# Altium PCB proLAYOUT.PcbDoc
Units mm, origin at the board's own origin, x right, y up, seen from the top; angles counter-clockwise.
Board outline 152.4 x 101.6 mm, 2 copper layers (Top Layer, Bottom Layer); 83 components, 52 nets, 274 pads, 27 vias.
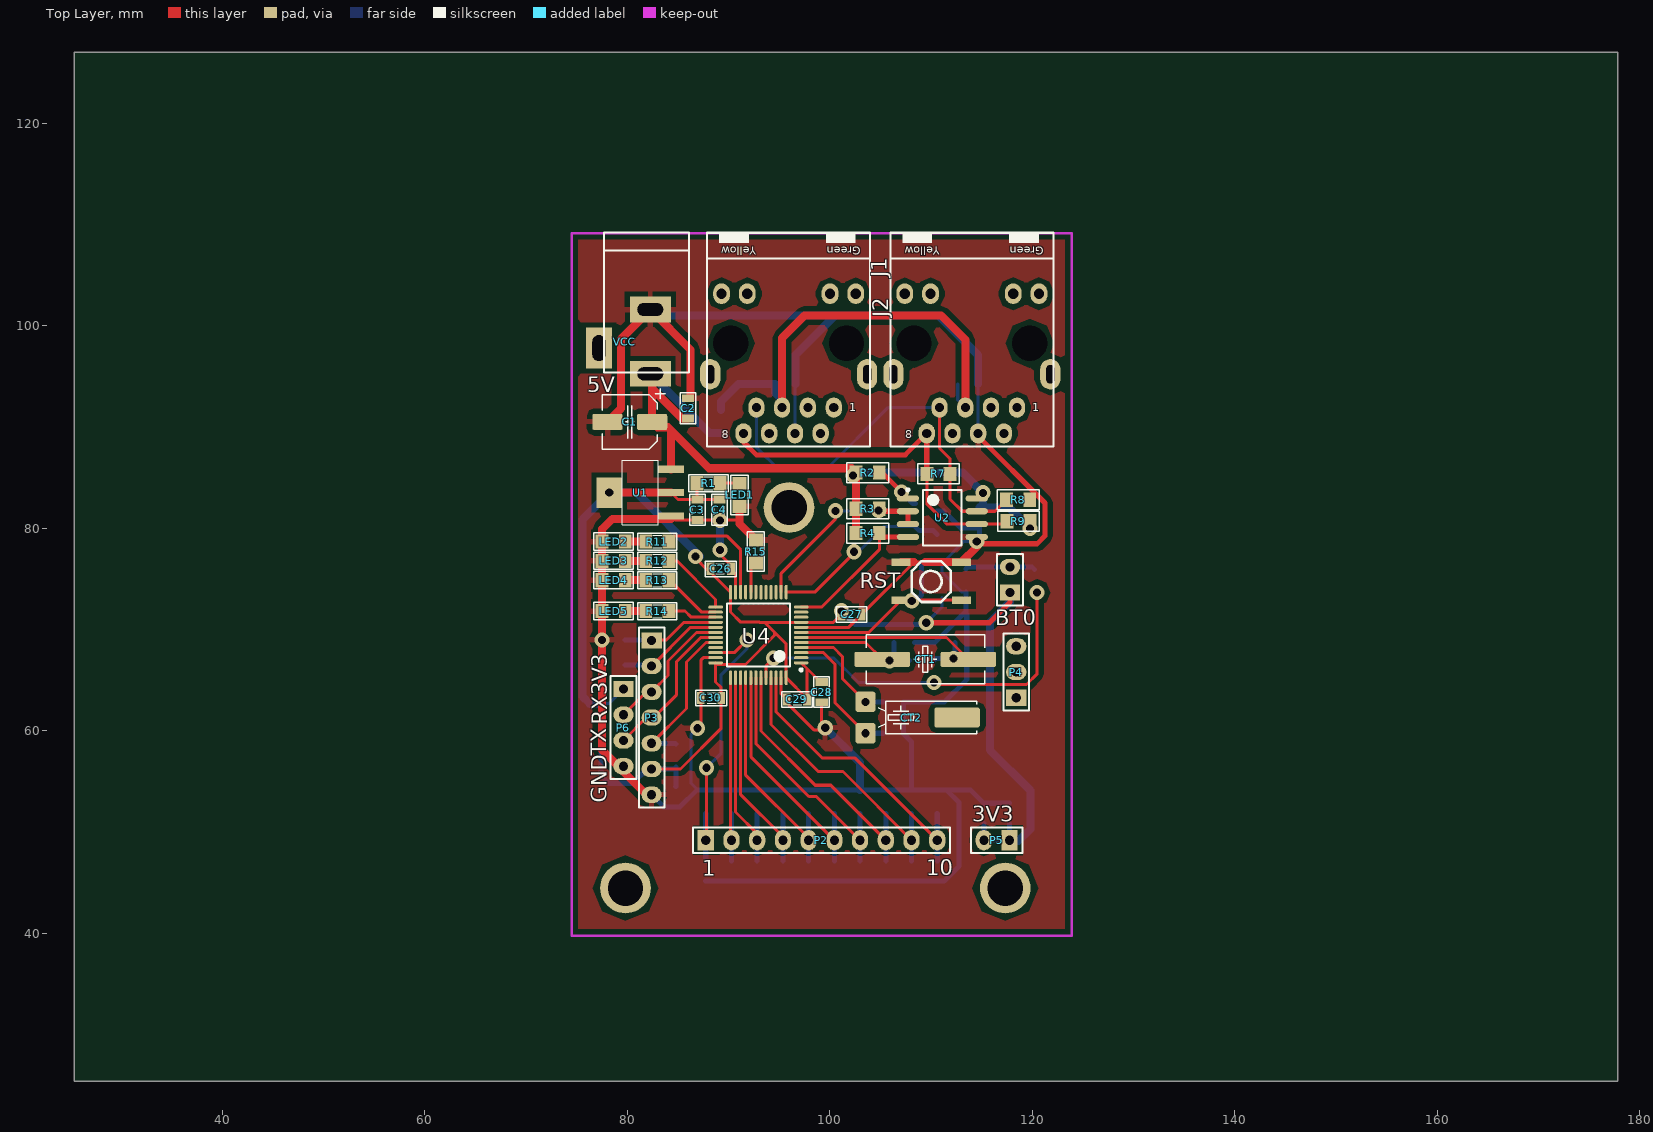
[diagram p0: Top Layer view]
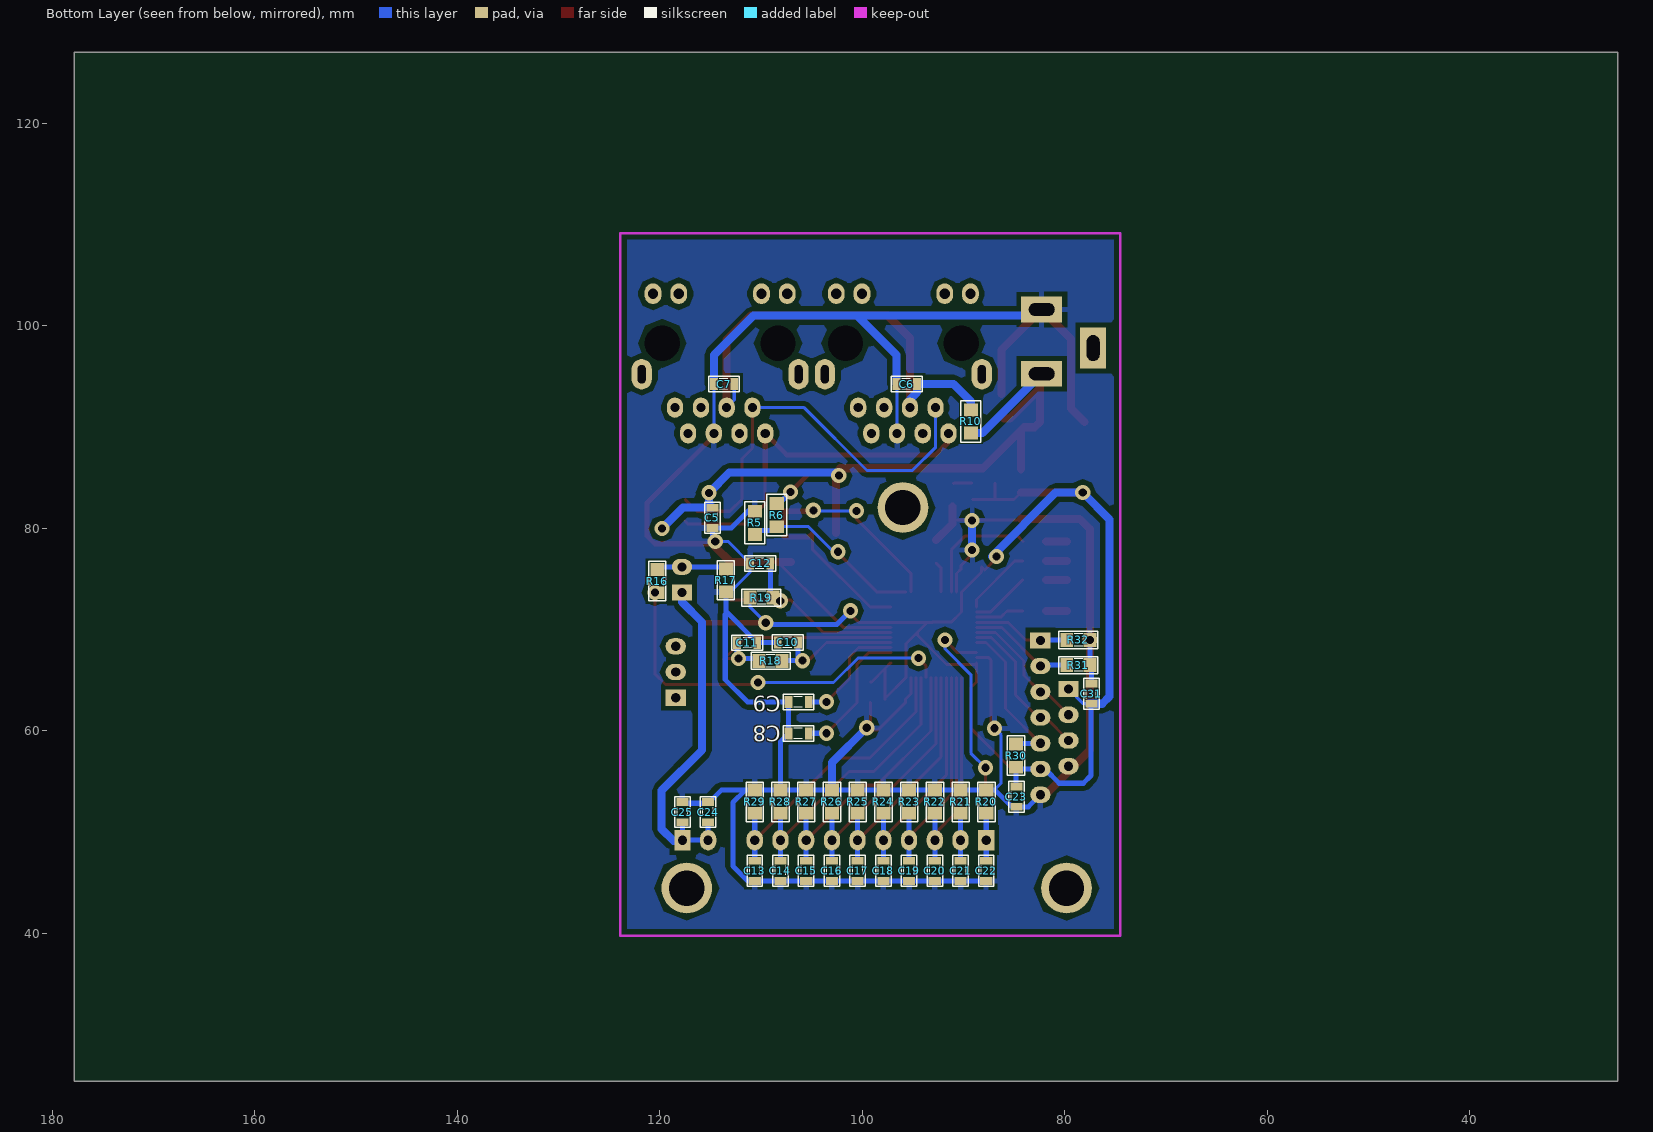
[diagram p1: Bottom Layer view, seen from below]
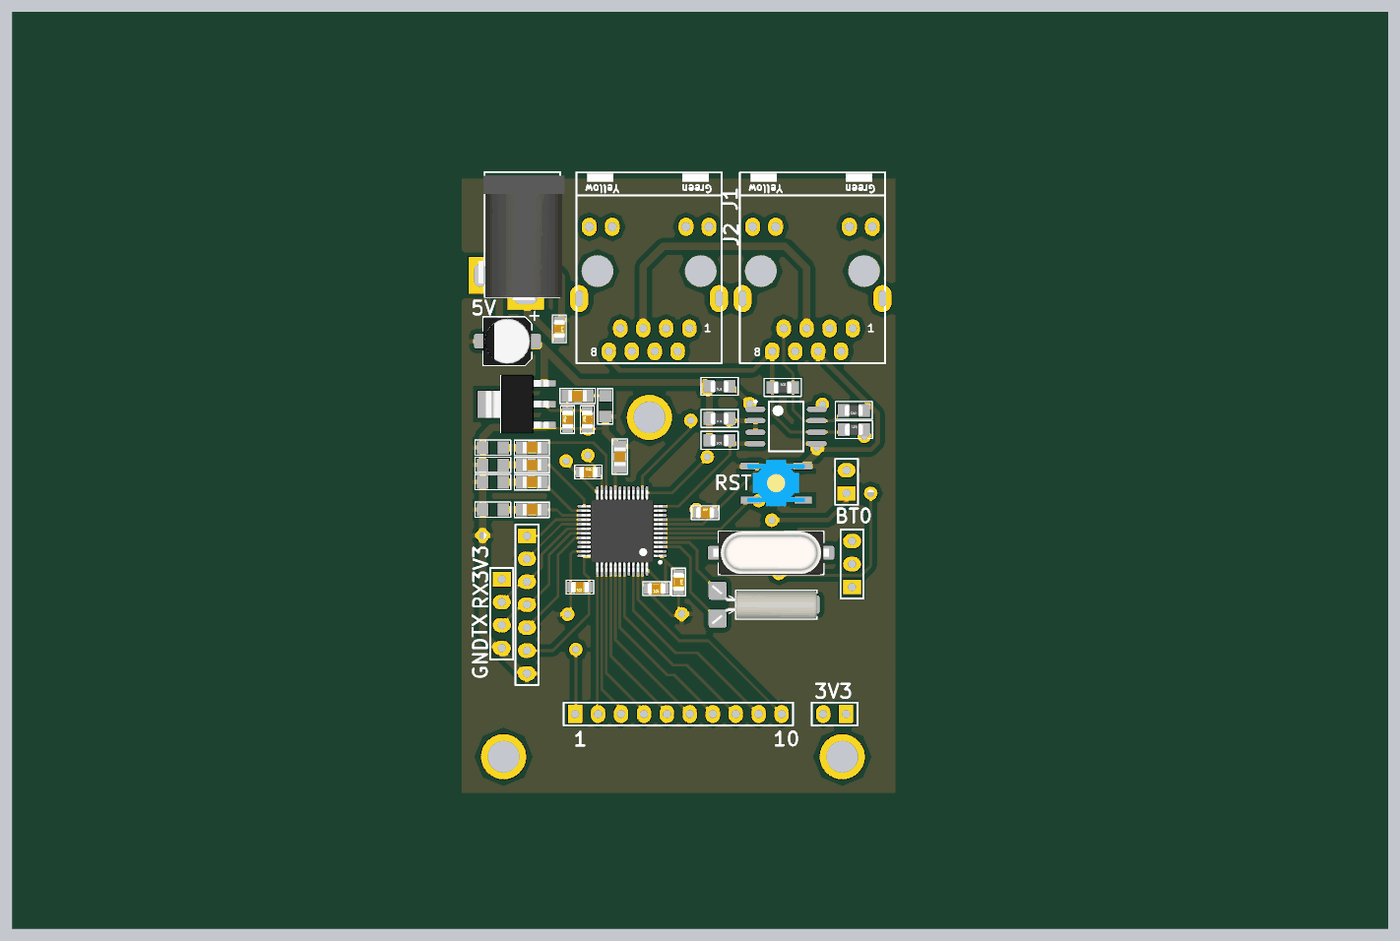
[diagram p2: 3D render of the assembled board from above, using the file's embedded part models]
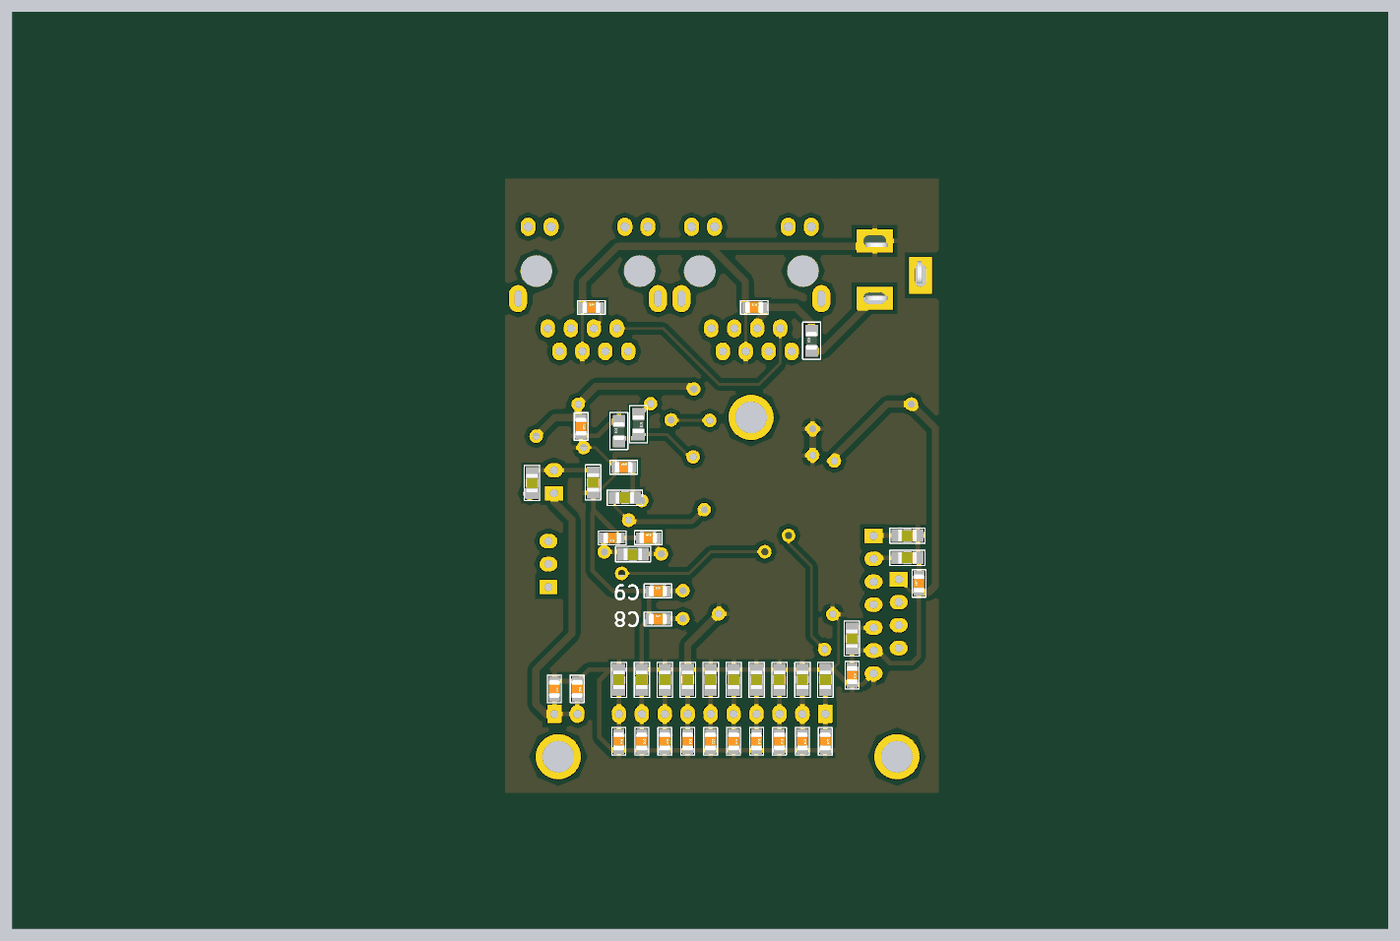
[diagram p3: 3D render of the assembled board from below, using the file's embedded part models]

## Layer stack, top to bottom
Top Solder: solder mask 0.0102, Solder Resist, Dk 3.5
Top Layer: signal copper 0.0356
Dielectric 1: dielectric 0.32, FR-4, Dk 4.8
Bottom Layer: signal copper 0.0356
Bottom Solder: solder mask 0.0102, Solder Resist, Dk 3.5

## Board outline
25.4,25.4 177.8,25.4 177.8,127 25.4,127

## Design rules (kind name [scope] priority, off if disabled: settings)
Clearance [All] p1: gap=0.5
ComponentClearance [All] p1: gap=0.2 collisioncheckmode=3 verticalgap=0.2 showdistances=FALSE
HoleSize [All] p1 off: absolutevalues=TRUE maxlimit=2.54 minlimit=0.025 maxpercent=80.000 minpercent=20.000
HoleToHoleClearance [All] p1 off: gap=0.254 allowstackedmicrovias=TRUE
LayerPairs [All] p1 off: enforce=TRUE
MinimumSolderMaskSliver [All] p1 off: minsoldermaskwidth=0.254
PolygonConnect [All] p1: connectstyle=Relief reliefconductorwidth=0.5 reliefentries=4 polygonreliefangle="90 Angle" airgapwidth=0.5
RoomDefinition proLAYOUT [InComponentClass('proLAYOUT')] p1: confinementstyle=ConfineIn formatcopy=TRUE lockcomponents=FALSE outline 178.943,26.924 685.292,26.924 685.292,55.372 178.943,55.372
RoutingVias [All] p1: holewidth=0.8 width=1.5 viastyle="Through Hole" minholewidth=0.8 minwidth=1.5 maxholewidth=1 maxwidth=2
SilkToSilkClearance [All] p1 off: silktosilkclearance=0.254
SilkToSolderMaskClearance [IsPad] p1 off: minsilkscreentomaskgap=0.254 clearancetoexposedcopper=TRUE
SolderMaskExpansion [All] p1: expansion=0.102
Width "LINE SIGNAL" [All] p1: maxlimit=0.8 minlimit=0.3 preferedwidth=0.5
Width "LINE POWER" [(InNet('VCC5V') OR InNet('GND') OR InNet('VCC3.3V'))] p2: maxlimit=1 minlimit=0.5 preferedwidth=0.8
23 further rules are at their usual default settings.

## Components (designator, comment, footprint, x,y, rotation, side; value= is the part's Value field where it differs from the comment)
BT0 "BOOT0" HDR1X2 117.8,73.65 r90 top (schematic designator P1)
C1 "10µF" CAP_ELEC_5x5.7 80.25,90.5 r0 top
C2 "104" SM-CAP-0805 86,93 r270 top
C3 "10uF" SM-CAP-0805 86.925,80.675 r90 top
C4 "104" SM-CAP-0805 89.1,80.675 r90 top
C5 "104" SM-CAP-0805 114.792,82.189 r270 bottom
C6 "104" SM-CAP-0805 96.758,94.234 r180 bottom
C7 "104" SM-CAP-0805 114.792,94.234 r180 bottom
C8 "10pF" SM-CAP-0805 107.43,59.725 r180 bottom
C9 "10pF" SM-CAP-0805 107.43,62.838 r180 bottom
C10 "22pF" SM-CAP-0805 108.5,68.725 r180 bottom
C11 "22pF" SM-CAP-0805 110.2,68.7 r0 bottom
C12 "104" SM-CAP-0805 111.225,76.525 r180 bottom
C13 "104" SM-CAP-0805 110.61,47.325 r270 bottom
C14 "104" SM-CAP-0805 108.07,47.325 r270 bottom
C15 "104" SM-CAP-0805 105.53,47.325 r270 bottom
C16 "104" SM-CAP-0805 102.99,47.325 r270 bottom
C17 "104" SM-CAP-0805 100.45,47.325 r270 bottom
C18 "104" SM-CAP-0805 97.91,47.325 r270 bottom
C19 "104" SM-CAP-0805 95.37,47.325 r270 bottom
C20 "104" SM-CAP-0805 92.83,47.325 r270 bottom
C21 "104" SM-CAP-0805 90.29,47.325 r270 bottom
C22 "104" SM-CAP-0805 87.75,47.325 r270 bottom
C23 "104" SM-CAP-0805 84.775,54.65 r270 bottom
C24 "104" SM-CAP-0805 115.225,53.125 r270 bottom
C25 "104" SM-CAP-0805 117.75,53.125 r270 bottom
C26 "104" SM-CAP-0805 88.075,76 r0 top
C27 "104" SM-CAP-0805 101,71.5 r0 top
C28 "104" SM-CAP-0805 99.2,64.975 r270 top
C29 "104" SM-CAP-0805 97.9,63.1 r180 top
C30 "104" SM-CAP-0805 89.425,63.25 r180 top
C31 "104" SM-CAP-0805 77.375,62.525 r90 bottom
CT1 "8Mhz" CRYSTAL_HC49-US-SM 109.434,67.057 r180 top
CT2 "32.768Khz" "CRYSTAL SMD 32,768 kHz" 105.525,61.314 r180 top
J1 "HR911105A" RJ45-LED 95.937,96.266 r0 top
J2 "HR911105A" RJ45-LED 114.03,96.266 r0 top
LED1 "LED" L-0805 91.1,83.3 r270 top
LED2 "LED" L-0805 78.653,78.69 r180 top
LED3 "LED" L-0805 78.653,76.785 r180 top
LED4 "LED" L-0805 78.653,74.875 r180 top
LED5 "LED" L-0805 78.653,71.825 r180 top
P2 "IRQ_HEADER" HDR1X10 87.75,49.2 r0 top
P3 "RF_HEAD_1" HDR1X7 82.409,68.928 r270 top
P4 "RF_HEAD_2" HDR1X3 118.409,63.268 r90 top
P5 "IRQ_PW" HDR1X2 117.75,49.2 r180 top
P6 "UART" HDR1X4 79.625,64.125 r270 top
R1 "1K" SM-0805 88.025,84.45 r0 top
R2 "10K" R-0805 103.743,85.491 r180 top
R3 "10K" R-0805 103.743,81.935 r180 top
R4 "10K" R-0805 103.743,79.522 r180 top
R5 "5K" R-0805 110.601,80.538 r90 bottom
R6 "10K" R-0805 108.442,81.3 r270 bottom
R7 "120R" R-0805 110.728,85.364 r0 top
R8 "10K" R-0805 118.602,82.824 r180 top
R9 "10K" R-0805 118.625,80.7 r0 top
R10 "0R" R-0805 89.265,90.551 r90 bottom
R11 "1K" SM-0805 82.971,78.69 r0 top
R12 "1K" SM-0805 82.971,76.785 r0 top
R13 "1K" SM-0805 82.971,74.875 r0 top
R14 "1K" SM-0805 82.971,71.825 r0 top
R15 "10K" SM-0805 92.7,77.7 r270 top
R16 "10K" SM-0805 120.225,74.775 r270 bottom
R17 "10K" SM-0805 113.45,74.85 r270 bottom
R18 "1M" SM-0805 109.05,66.9 r0 bottom
R19 "10K" SM-0805 109.95,73.15 r180 bottom
R20 "10K" SM-0805 87.75,53 r90 bottom
R21 "10K" SM-0805 90.29,53 r90 bottom
R22 "10K" SM-0805 92.83,53 r90 bottom
R23 "10K" SM-0805 95.37,53 r90 bottom
R24 "10K" SM-0805 97.91,53 r90 bottom
R25 "10K" SM-0805 100.45,53 r90 bottom
R26 "10K" SM-0805 102.99,53 r90 bottom
R27 "10K" SM-0805 105.53,53 r90 bottom
R28 "10K" SM-0805 108.07,53 r90 bottom
R29 "10K" SM-0805 110.61,53 r90 bottom
R30 "10K" SM-0805 84.8,57.55 r270 bottom
R31 "10K" SM-0805 78.653,66.5 r180 bottom
R32 "10K" SM-0805 78.653,68.975 r180 bottom
RST "RESET" "SW4 CMD M" 110,74.75 r0 top (schematic designator SW1)
U1 "LM1117-3.3V" LM1117-SOP 83.05,83.525 r90 top
U2 "MAX485" SO8W_N 111.109,81.046 r0 top
U4 "STM32F103C8T6" STM32_LQPF48 92.948,69.469 r180 top
VCC "5V" DC-IN 79.74,98.425 r270 top

## Footprints (in the part's own frame and the unit in brackets; to place one, negate y for a bottom-side part, rotate by r counter-clockwise, add the part's x,y. Pads: shape width x height; smd on the part's side, far side on the other; paste and mask are expansions set on the pad)
CAP_ELEC_5x5.7 [mm] "Capacitor, polarized, aluminum can; 5x5.7mm DxH"
  round 0.508 on Mech15: 0(0,0)
  rrect25% 3x1.6 smd: 1(2.2,0) 2(-2.2,0)
  silkscreen extent -2.7,-2.7 3.5,3.3, body extent -2.65,-2.65 2.65,2.65, height 5.7
"CRYSTAL SMD 32,768 kHz" [mm] "SMD Crystal CMR309T package"
  round 0.508 on Mech15: 0(0,0)
  rrect25% 2x2 smd: 1(2,-1.55) 2(2,1.55)
  rrect25% 4.5x2 smd: SH(-7.05,0)
  silkscreen extent -9,-1.6 0.72,1.6, body extent -9,-2.25 2.73,2.25, height 3.07
CRYSTAL_HC49-US-SM [mm] "SMD Crystal HC49/US-SM package"
  round 0.508 on Mech15: 0(0,0)
  rrect25% 5.5x1.5 smd: 1(-4.25,0) 2(4.25,0)
  silkscreen extent -5.84,-2.41 5.84,2.41, body extent -6.4,-2.41 6.4,2.42, height 4.29
DC-IN [mil] "Jac DC input"
  rect 100x160 hole 50 slot 100 at 90 deg: 1(125,100) 2(-125,100)
  rect 160x100 hole 50 slot 100 at 0 deg: 3(25,-100)
  silkscreen extent -425,-80 120,250, body extent -410,-105 134,269, height 434
HDR1X2 [mm] "Connector; Header; 2 Position"
  rect 1.6x2 hole 0.9: 1(0,0)
  oval 1.6x2 hole 0.9: 2(2.54,0)
  silkscreen extent -1.27,-1.27 3.81,1.27, body extent -1.27,-1.27 3.81,1.27, height 7
HDR1X3 [mm] "Connector; Header; 3 Position"
  rect 1.6x2 hole 0.9: 1(0,0)
  oval 1.6x2 hole 0.9: 2(2.54,0) 3(5.08,0)
  silkscreen extent -1.27,-1.27 6.35,1.27, body extent -1.27,-1.27 6.35,1.27, height 7
HDR1X4 [mm] "Connector; Header; 4 Position"
  rect 1.6x2 hole 0.9: 1(0,0)
  oval 1.6x2 hole 0.9: 2(2.54,0) 3(5.08,0) 4(7.62,0)
  silkscreen extent -1.27,-1.27 8.89,1.27, body extent -1.27,-1.27 8.89,1.27, height 7
HDR1X7 [mm] "Connector; Header; 7 Position"
  rect 1.6x2 hole 0.9: 1(0,0)
  oval 1.6x2 hole 0.9: 2(2.54,0) 3(5.08,0) 4(7.62,0) 5(10.16,0) 6(12.7,0) 7(15.24,0)
  silkscreen extent -1.27,-1.27 16.51,1.27, body extent -1.27,-1.27 16.51,1.27, height 7
HDR1X10 [mm] "Connector; Header; 10 Position"
  rect 1.6x2 hole 0.9: 1(0,0)
  oval 1.6x2 hole 0.9: 2(2.54,0) 3(5.08,0) 4(7.62,0) 5(10.16,0) 6(12.7,0) 7(15.24,0) 8(17.78,0) 9(20.32,0) 10(22.86,0)
  silkscreen extent -1.27,-1.27 24.13,1.27, body extent -1.27,-1.27 24.13,1.27, height 7
L-0805 [mil] "Compoment SMD 80x50mil"
  rect 50x55 smd: 1(-45,0) 2(45,0)
  silkscreen extent -77,-34 78,33, body extent -50,-20 50,20, height 43
LM1117-SOP [mm]
  rect 0.7x2.54 smd: 1(-2.3,-1.27) 2(0,-1.27) 3(2.3,-1.27)
  rect 3x2.54 smd: 2(0,4.826)
  silkscreen extent -3.18,0 3.17,3.56, body extent -3.25,-1.78 3.25,5.18, height 1.68
R-0805 [mil] "Compoment SMD 80x50mil"
  rect 50x55 smd: 1(-45,0) 2(45,0)
  silkscreen extent -81,-39 81,39, body extent -39,-25 39,25, height 31
RJ45-LED [mm] "Single Port RJ45 Connector with Intergrated Magetic (LAN) - Tranformer & LED"
  oval 2x3 hole 0.8 slot 1.8 at 90 deg: 0(-7.745,-1.055) 0(7.745,-1.055)
  oval 1.6x2 hole 0.9: 1(4.458,-4.355) 2(3.162,-6.895) 3(1.892,-4.355)
  oval 1.6x2 hole 0.9 paste+2.54: 4(0.622,-6.895) 5(-0.648,-4.355) 6(-1.918,-6.895) 7(-3.188,-4.355) 8(-4.458,-6.895)
  oval 1.651x2.032 hole 1: 9(6.625,6.895) 10(4.085,6.895) 11(-4.085,6.895) 12(-6.625,6.895)
  round 2 hole 3.5 paste+2.54: Hole1(-5.715,1.995) Hole1(5.715,1.995)
  silkscreen extent -8.05,-8.2 8.05,12.92
SM-0805 [mil] "Compoment SMD 80x50mil"
  rect 50x55 smd: 1(-45,0) 2(45,0)
  silkscreen extent -77,-34 76,33, body extent -40,-25 40,25, height 24
SM-CAP-0805 [mil]
  rect 30x47.24 smd: 1(6,0) 2(85,0)
  silkscreen extent -15,-30 105,30, body extent 6,-25 84,25, height 31
SO8W_N [mm] "SOP, 8-Leads, Body 5.3x5.3mm, Pitch 1.27mm, IPC Medium Density"
  oval 2.2x0.6 smd: 1(-3.4,1.905) 2(-3.4,0.635) 3(-3.4,-0.635) 4(-3.4,-1.905) 5(3.4,-1.905) 6(3.4,-0.635) 7(3.4,0.635) 8(3.4,1.905)
  silkscreen extent -3.52,-2.75 1.9,2.88, body extent -2.73,-2.75 2.73,2.75, height 2.13
STM32_LQPF48 [mm]
  oval 1.45x0.3 smd: 1(-4.225,2.75) 2(-4.225,2.25) 3(-4.225,1.75) 4(-4.225,1.25) 5(-4.225,0.75) 6(-4.225,0.25) 7(-4.225,-0.25) 8(-4.225,-0.75) 9(-4.225,-1.25) 10(-4.225,-1.75) 11(-4.225,-2.25) 12(-4.225,-2.75) 25(4.225,-2.75) 26(4.225,-2.25) 27(4.225,-1.75) 28(4.225,-1.25) 29(4.225,-0.75) 30(4.225,-0.25) 31(4.225,0.25) 32(4.225,0.75) 33(4.225,1.25) 34(4.225,1.75) 35(4.225,2.25) 36(4.225,2.75)
  oval 0.3x1.45 smd: 13(-2.75,-4.225) 14(-2.25,-4.225) 15(-1.75,-4.225) 16(-1.25,-4.225) 17(-0.75,-4.225) 18(-0.25,-4.225) 19(0.25,-4.225) 20(0.75,-4.225) 21(1.25,-4.225) 22(1.75,-4.225) 23(2.25,-4.225) 24(2.75,-4.225) 37(2.75,4.225) 38(2.25,4.225) 39(1.75,4.225) 40(1.25,4.225) 41(0.75,4.225) 42(0.25,4.225) 43(-0.25,4.225) 44(-0.75,4.225) 45(-1.25,4.225) 46(-1.75,4.225) 47(-2.25,4.225) 48(-2.75,4.225)
  silkscreen extent -4.35,-3.1 3.1,3.57, body extent -4.5,-4.5 4.5,4.5, height 1.6
"SW4 CMD M" [mil]
  rect 75x30 smd: 1(-117,75) 1(118,75) 2(-117,-73) 2(118,-73)
  silkscreen extent -75,-80 76,79, body extent -126,-101 126,103, height 60

## Part data
BT0 P5: library part "Header 2", "Header, 2-Pin"
C1: library part "CAP Aluminum"
C2 C3 C4 C5 C6 C7 C8 C9 C10 C11 C12 C13 C14 C15 C16 C17 C18 C19 C20 C21 C22 C23 C24 C25 C26 C27 C28 C29 C30 C31: library part "CAP SMD"
CT1 CT2: library part CRYSTAL, "Crystal For all Crystal 2pin."
J1 J2: library part RJ45-LAN_05A, "HR911105A Single RJ45 Connector LED"
LED1 LED2 LED3 LED4 LED5: "LED Single colour Green and Red"
P2: library part "Header 10", "Header, 10-Pin"
P3: library part "Header 7", "Header, 7-Pin"
P4: library part "Header 3", "Header, 3-Pin"
P6: library part "Header 4", "Header, 4-Pin"
R1 R11 R12 R13 R14 R15 R16 R17 R18 R19 R20 R21 R22 R23 R24 R25 R26 R27 R28 R29 R30 R31 R32: library part RM, "Resistor SMD"
R2 R3 R4 R5 R6 R7 R8 R9 R10: library part R, "Resistor 1/4W"
RST: library part SW4-1, "Switch button 4 pin"
U1: library part LM1117, "800mA Low-Dropout Linear Regulator"
U2: library part max485_smd
U4: library part STM32F103xx_LQFP48, "STM32 ARM-based 32-bit MCU with 64 Kbytes Flash, 48-pin LQFP, Industrial Temperature"
VCC: library part DCIN

## Free pads (board coordinates)
  round 5 hole 3.5: 0(79.825,44.475) 1(95.975,82.05) 2(117.325,44.475)

## Via types
v1: diameter 1.5, hole 0.8, Top Layer to Bottom Layer, 27 vias

## Nets (pads, with @x,y where several pads share a name; then routed paths per layer and width w, separated by ;. In a path a pad name is that pad's centre, name@x,y a point inside that pad or via, vN(x,y) a via of type N, cw(c..) or ccw(c..) an arc to the next point about the centre after c; other vN are vias at no path point)
BOOT_0: R16.2 U4.44 | length 38.1
  Top Layer w0.3: U4.44 93.698,66.423 v1(94.45,67.175) ; v1(110.3,64.775) 110.5,64.575 119.425,64.575 120.475,65.625 v1(120.475,73.65)
  Bottom Layer w0.3: v1(94.45,67.175) 100.425,67.175 102.825,64.775 v1(110.3,64.775) ; R16.2 120.457,73.632 v1(120.475,73.65)
BOOT_1: R15.2 U4.20 | length 3.1
  Top Layer w0.3: U4.20 92.198,76.055 R15.2
GND: C1.2 C2.1 C3.1 C4.1 C5.2 C6.1 C7.1 C8.1 C9.1 C10.1 C11.1 C12.1 C13.2 C14.2 C15.2 C16.2 C17.2 C18.2 C19.2 C20.2 C21.2 C22.2 C23.2 C24.1 C25.1 C26.2 C27.2 C28.2 C29.2 C30.2 C31.2 J1.4 J2.4 LED1.2 LED2.2 LED3.2 LED4.2 LED5.2 P3.7 P6.4 R5.2 R8.1 R15.1 R17.2 R20.2 R21.2 R22.2 R23.2 R24.2 R25.2 R26.2 R27.2 R28.2 R29.2 R31.2 R32.2 RST.1 U1.1 U2.5 U4.8 U4.23 U4.35 U4.47 VCC.2 | length 329.4
  Top Layer w0.3: LED5.2@77.457,71.825 LED5.2@77.482,71.85 ; U1.1 84.718,80.827 C3.1 C4.1 ; v1(86.925,60.25) 87.266,60.591 C30.2 87.266,66.966 87.519,67.219 U4.35 ; v1(89.15,77.85) 89.15,77.425 90.234,76.341 C26.2 90.698,75.536 U4.23 ; C4.1@89.15,80.827 91.1,80.827 ; U4.47 95.198,63.643 C29.2 95.741,62.784 98.425,60.1 v1@99.2,60.1 ; U4.8 101.878,70.219 C27.2 108.314,76.655 109.425,76.655 ; C28.2 99.2,60.65 v1(99.55,60.3)
  Top Layer w0.5: v1(114.509,78.709) U2.5 ; J2.4 114.652,89.098 121.25,82.5 121.25,79.25 120.475,78.475 v1@115.175,78.475
  Top Layer w0.8: C1.2 79.375,91.825 79.375,98.695 VCC.2 86.25,97.63 86.25,93.25 ; P3.7 81.912,53.688 77.51,58.09 v1(77.51,68.975) LED5.2 LED4.2 LED3.2 LED2.2 77.51,79.91 78.525,80.925 U1.1@84.32,80.925 ; LED1.2 91.1,80.827 91.1,80.443 R15.1 ; RST.1@107.028,76.655 108.314,76.655 ; 109.425,76.655 112.997,76.655 114.509,78.167 v1(114.509,78.709)
  Bottom Layer w0.3: 86.925,54.2 86.275,54.85 86.275,59.6 v1(86.925,60.25) ; J1.4 96.559,94.188 C6.1 ; R17.2 113.018,73.707 111.073,75.652 C12.1 113.257,78.709 v1(114.509,78.709) ; C7.1 114.652,94.221 J2.4
  Bottom Layer w0.5: C31.2 77.375,66.365 R31.2 v1(77.51,68.975) ; P3.7 83.606,52.491 C23.2 85.216,52.491 86.868,54.143 R20.2 R21.2 R26.2 R28.2 ; C22.2 C21.2 C20.2 C19.2 C18.2 C17.2 C16.2 C15.2 C14.2 C13.2 111.291,45.166 112.775,46.65 112.775,52.918 111.55,54.143 R29.2 ; C10.1 110.327,68.725 C11.1 113.45,71.798 ; R5.2 111.269,81.681 112.92,80.03 C5.2 114.792,78.992 v1(114.509,78.709) ; R17.2 113.45,71.798 ; C25.1@117.75,52.848 115.21,52.848 113.915,54.143 R29.2 ; R28.2 108.07,58.928 107.273,59.725 107.278,59.73 C9.1 111.313,62.838 113.525,65.05 113.525,71.475 113.45,71.55 113.45,71.798 ; R28.2 R29.2
  Bottom Layer w0.8: VCC.2 82.28,101 100.5,101 ; v1(89.15,77.85) v1(89.15,80.777) ; C6.1 96.606,97.106 100.5,101 ; v1(99.55,60.3) 102.99,56.86 R26.2 ; C7.1 114.64,97.11 110.75,101 100.5,101
IRQ_1: C22.1 P2.1 R20.1 U4.34 | length 29.8
  Top Layer w0.3: P2.1 87.825,49.275 v1(87.825,56.35) ; U4.34 90.569,67.719 v1(91.825,68.975)
  Bottom Layer w0.3: v1(87.825,56.35) 89.273,57.798 89.273,65.548 91.825,68.1 v1(91.825,68.975)
  Bottom Layer w0.5: C22.1 P2.1 R20.1
IRQ_2: C21.1 P2.2 R21.1 U4.37 | length 20.8
  Top Layer w0.3: U4.37 90.198,49.292 P2.2
  Bottom Layer w0.5: C21.1 P2.2 R21.1
IRQ_3: C20.1 P2.3 R22.1 U4.38 | length 21.6
  Top Layer w0.3: U4.38 90.698,51.977 92.83,49.845 P2.3
  Bottom Layer w0.5: C20.1 P2.3 R22.1
IRQ_4: C19.1 P2.4 R23.1 U4.39 | length 22.5
  Top Layer w0.3: U4.39 91.198,53.702 95.37,49.53 P2.4
  Bottom Layer w0.5: C19.1 P2.4 R23.1
IRQ_5: C18.1 P2.5 R24.1 U4.40 | length 23.3
  Top Layer w0.3: U4.40 91.698,55.627 97.91,49.415 P2.5
  Bottom Layer w0.5: C18.1 P2.5 R24.1
IRQ_6: C17.1 P2.6 R25.1 U4.41 | length 24.1
  Top Layer w0.3: U4.41 92.198,57.452 P2.6
  Bottom Layer w0.5: C17.1 P2.6 R25.1
IRQ_7: C16.1 P2.7 R26.1 U4.42 | length 25.4
  Top Layer w0.3: U4.42 92.698,58.752 97.925,53.525 98.665,53.525 P2.7
  Bottom Layer w0.5: C16.1 P2.7 R26.1
IRQ_8: C15.1 P2.8 R27.1 U4.43 | length 26.7
  Top Layer w0.3: U4.43 93.198,59.977 98.55,54.625 100.105,54.625 P2.8
  Bottom Layer w0.5: C15.1 P2.8 R27.1
IRQ_9: C14.1 P2.9 R28.1 U4.45 | length 27.9
  Top Layer w0.3: U4.45 94.198,60.627 98.85,55.975 101.295,55.975 P2.9
  Bottom Layer w0.5: C14.1 P2.9 R28.1
IRQ_10: C13.1 P2.10 R29.1 U4.46 | length 29.2
  Top Layer w0.3: U4.46 94.698,61.877 99.275,57.3 102.51,57.3 P2.10
  Bottom Layer w0.5: C13.1 P2.10 R29.1
LED_1: R11.2 U4.22 | length 12.1
  Top Layer w0.3: R11.2 84.674,79.25 89.821,79.25 91.198,77.873 U4.22
LED_2: R12.2 U4.25 | length 6.9
  Top Layer w0.3: R12.2 84.915,76.785 88.723,72.977 U4.25
LED_3: R13.2 U4.26 | length 5.9
  Top Layer w0.3: R13.2 84.2,74.875 87.356,71.719 U4.26
LED_4: R14.2 U4.27 | length 4.9
  Top Layer w0.3: R14.2 85.7,71.825 86.306,71.219 U4.27
M485_A: J1.8 J2.8 R7.1 R9.1 U2.6 | length 36.2
  Top Layer w0.3: R7.1@109.572,85.377 R7.1 109.585,82.415 111.589,80.411 U2.6 117.193,80.411 R9.1
  Top Layer w0.5: J1.8 91.479,88.521 92.75,87.25 107.451,87.25 J2.8 R7.1@109.572,85.377
M485_B: J1.7 J2.7 R7.2 R8.2 U2.7 | length 41.5
  Top Layer w0.3: J2.7 110.842,87.908 111.871,86.879 R7.2 111.871,82.879 113.069,81.681 U2.7 116.316,81.681 R8.2
  Bottom Layer w0.3: J1.7 92.749,88.001 95.05,85.7 99.525,85.7 105.736,91.911 J2.7
M485_DI: R4.1 U2.4 U4.12 | length 14.7
  Top Layer w0.3: U4.12 99.219,72.219 104.886,77.886 R4.1
  Top Layer w0.5: R4.1 105.267,79.141 U2.4
M485_EN: R3.1 U2.2 U2.3 U4.14 | length 18.6
  Top Layer w0.3: U4.14 95.198,75.548 100.55,80.9 v1(100.55,81.725) ; v1(104.825,81.775) 104.886,81.836 R3.1
  Top Layer w0.5: R3.1@105.14,81.681 U2.2 U2.3
  Bottom Layer w0.3: v1(100.55,81.725) 104.775,81.725 v1(104.825,81.775)
M485_PW: C6.2 C7.2 J1.5 J2.5 R10.2 | length 45.7
  Top Layer w0.8: J1.5 95.289,98.789 97.5,101 111,101 113.382,98.618 J2.5
  Bottom Layer w0.3: C7.2 112.633,92.66 J2.5
  Bottom Layer w0.8: R10.2 89.265,92.515 90.984,94.234 C6.2 94.599,93.401 95.289,92.711 J1.5
M485_RO: R5.1 R6.2 U4.13 | length 18.2
  Top Layer w0.3: U4.13 98.519,73.694 102.45,77.625 102.434,77.625 v1(102.38,77.679)
  Bottom Layer w0.3: v1(102.38,77.679) 102.6,77.459 105.298,80.157 R6.2
  Bottom Layer w0.5: R6.2 108.838,79.761 110.235,79.761 R5.1
NetLED1_1: LED1.1 R1.2 | length 1.8
  Top Layer w0.3: R1.2 90.957,84.45 LED1.1@90.982,84.425
NetLED2_1: LED2.1 R11.1 | length 2
  Top Layer w0.8: LED2.1 R11.1
NetLED3_1: LED3.1 R12.1 | length 2
  Top Layer w0.8: LED3.1 R12.1
NetLED4_1: LED4.1 R13.1 | length 2
  Top Layer w0.8: LED4.1 R13.1
NetLED5_1: LED5.1 R14.1 | length 2
  Top Layer w0.8: LED5.1 R14.1
NetP1_2: BT0.2 R16.1 R17.1 | length 7
  Bottom Layer w0.5: R17.1 113.647,76.19 BT0.2 119.953,76.19 R16.1
NetR2_1: R2.1 R6.1 U2.1 | length 5.7
  Top Layer w0.5: R2.1 105.169,85.491 v1(107.093,83.568) U2.1
  Bottom Layer w0.5: v1(107.093,83.568) 108.217,82.443 R6.1
OSCIN: C10.2 CT1.2 R18.1 U4.5 | length 13.5
  Top Layer w0.3: U4.5 103.522,68.719 CT1.2 105.893,67.057 105.905,67.045 v1(105.905,66.928)
  Bottom Layer w0.5: C10.2 106.341,67.364 v1(105.905,66.928) R18.1@107.879,66.928
OSCOUT: C11.2 CT1.1 R18.2 U4.6 | length 22.5
  Top Layer w0.3: U4.6 111.522,69.219 CT1.1@113.591,67.15 ; v1(112.225,67.15) CT1.1@113.591,67.15 ; CT1.1 CT1.1@113.591,67.15
  Bottom Layer w0.5: R18.2 110.443,67.15 v1(112.225,67.15) 112.359,67.284 C11.2
PA1: U4.10
PA2: U4.11
PA5: U4.15
PA6: U4.16
PA7: U4.17
PA12: U4.33
PB0: U4.18
PB1: U4.19
PB10: U4.21
PC13: U4.2
REAL_IN: C8.2 CT2.2 U4.3 | length 13.6
  Top Layer w0.3: U4.3 99.381,67.719 100.5,66.6 100.5,62.789 v1(103.525,59.764)
  Bottom Layer w0.5: v1(103.525,59.764) 105.227,59.764 C8.2@105.266,59.725
REAL_OUT: C9.2 CT2.1 U4.4 | length 11.6
  Top Layer w0.3: U4.4 100.356,68.219 101.25,67.325 101.25,65.139 CT2.1 v1(103.514,62.864)
  Bottom Layer w0.5: v1(103.514,62.864) 105.245,62.864 C9.2
RESET: C12.2 R19.2 RST.2 U4.7 | length 21.7
  Top Layer w0.3: U4.7 103.851,69.719 107.028,72.896 108.029,72.896 v1(108.09,72.835) ; RST.2@107.975,72.896 RST.2@112.997,72.896
  Bottom Layer w0.3: v1(108.09,72.835) 108.585,72.835 108.807,73.057 R19.2
  Bottom Layer w0.5: R19.2 109.066,73.409 C12.2
RF_AUX: P3.5 R30.1 U4.32 | length 15.5
  Top Layer w0.3: P3.5 85.85,62.209 85.85,66.8 87.769,68.719 U4.32
  Bottom Layer w0.5: P3.5 84.725,58.768 R30.1
RF_M0: P3.1 R32.1 U4.28 | length 9.7
  Top Layer w0.3: P3.1 82.431,68.95 83.825,68.95 85.594,70.719 U4.28
  Bottom Layer w0.5: R32.1 82.362,68.975 P3.1
RF_M1: P3.2 R31.1 U4.29 | length 10.6
  Top Layer w0.3: P3.2 86.24,70.219 U4.29
  Bottom Layer w0.5: R31.1 82.297,66.5 P3.2
RF_RXD: P3.3 P6.2 U4.30 | length 13.3
  Top Layer w0.3: P6.2 82.01,63.97 82.531,63.97 84.025,65.464 84.025,66.9 86.844,69.719 U4.30
RF_TXD: P3.4 P6.3 U4.31 | length 15.2
  Top Layer w0.3: P6.3 81.888,61.308 P3.4 82.608,61.308 84.875,63.575 84.875,66.85 87.244,69.219 U4.31
VCC3.3V: BT0.1 C3.2 C4.2 C23.1 C24.2 C25.2 C26.1 C27.1 C28.1 C29.1 C30.1 C31.1 P3.6 P5.1 P5.2 P6.1 R1.1 R19.1 R30.2 U1.2 U4.1 U4.9 U4.24 U4.36 U4.48 | length 182.1
  Top Layer w0.3: P3.6 85.253,56.228 89.273,60.248 C30.1 89.273,64.277 88.723,64.827 88.723,66.55 ; U1.2@84.32,83.525 85.011,82.834 C3.2 ; v1(86.75,77.225) 86.75,77.03 87.905,75.875 88.227,76.198 C26.1 88.227,75.665 U4.24 90.198,71.727 91.2,70.725 93.075,70.725 93.081,70.719 93.556,70.719 ; R1.1 86.882,82.877 C3.2 ; U4.36 88.723,66.55 ; C4.2 C3.2 ; U4.1 97.748,66.144 ; C29.1 C29.1@97.748,63.194 ; C28.1 99.069,64.823 97.748,66.144 ; v1(101.152,71.848) C27.1 100.371,70.719 U4.9 93.556,70.719 ; 88.723,66.55 91.675,66.55 94.55,69.425 94.55,69.725 ; 93.556,70.719 94.55,69.725 ; 94.55,69.725 95.698,68.577 U4.48 C29.1@97.748,63.194 ; C29.1@97.748,63.194 97.748,66.144
  Top Layer w0.5: v1(109.525,70.675) 115.775,70.675 117.8,72.7 BT0.1
  Top Layer w0.8: v1(78.224,83.525) U1.2@84.32,83.525
  Bottom Layer w0.3: C31.1@77.625,62.677 78.177,62.677 P6.1 ; v1(109.525,70.675) 111.093,72.243 R19.1
  Bottom Layer w0.5: C31.1@77.625,62.677 77.4,62.452 77.4,55.6 78.175,54.825 80.55,54.825 81.953,56.228 P3.6 84.621,56.228 R30.2 84.8,54.523 C23.1 ; v1(101.152,71.848) 102.5,70.5 109.35,70.5 v1(109.525,70.675) ; C24.2@115.21,50.841 P5.2 P5.1 C25.2@117.75,50.841
  Bottom Layer w0.8: C31.1@77.625,62.677 C31.1 76.298,62.677 75.575,63.4 75.575,80.876 v1(78.224,83.525) 80.9,83.525 87.2,77.225 v1(86.75,77.225) ; P5.1 117.8,49.15 118.65,49.15 119.8,50.3 119.8,54.1 115.8,58.1 115.8,70.725 117.8,72.725 BT0.1
VCC5V: C1.1 C2.2 C5.1 R2.2 R3.2 R4.2 R9.2 R10.1 U1.3 U2.8 VCC.1 | length 72.4
  Top Layer w0.8: 82.45,93.8 85.409,90.841 C2.2 ; VCC.1@82.45,95.08 C1.1 82.975,89.975 84.025,89.975 84.32,89.68 ; U1.3 84.32,89.68 ; v1(102.309,85.2) R2.2 ; R4.2 R3.2 R2.2 ; 84.32,89.68 88.075,85.925 102.166,85.925 R2.2
  Bottom Layer w0.8: VCC.1 88.122,89.408 R10.1 ; v1(102.309,85.2) 102.609,85.5 113.125,85.5 v1(115.125,83.5) 115.125,82.37 C5.1 117.699,82.037 v1(119.768,79.968)
pads on no net: C1.0 CT1.0 CT2.0 CT2.SH J1.0 J1.1 J1.2 J1.3 J1.6 J1.9 J1.10 J1.11 J1.12 J1.Hole1 J2.0 J2.1 J2.2 J2.3 J2.6 J2.9 J2.10 J2.11 J2.12 J2.Hole1 P4.1 P4.2 P4.3 VCC.3

## Polygon pours and split planes (outlines as drawn)
GND on Top Layer "Top Layer-No Net" (solid, pour order 0): 74.525,107.2 74.525,109.15 123.9,109.15 123.725,40.225 123.475,39.975 123.225,40.225 74.4,40.225 74.4,106.825 74.525,106.95
GND on Bottom Layer "Top Layer-No Net" (solid, pour order 2): 74.475,106.775 74.5,108.925 123.9,108.925 123.9,39.775 74.5,39.775 74.5,106.7 74.575,106.775

## Keep-outs
Keep-Out Layer:
  lines w0.254: 74.5,39.775 74.5,109.15 76.5,109.15 123.9,109.15 123.9,39.775 74.5,39.775

## Silkscreen, mask and mechanical layers (free items; w line width, h text height)
Top Overlay:
  text "5V" at 76.05,93.45 h1.52
  text "3V3" at 78.025,63.525 h1.52 r90
  text "RX" at 78.025,60.6 h1.52 r90
  text "TX" at 77.925,57.525 h1.52 r90
  text "GND" at 77.975,52.875 h1.52 r90
  text "3V3" at 114.075,51 h1.52
  text "10" at 109.525,45.725 h1.52
  text "1" at 87.425,45.7 h1.52

## Text inside footprints (layer, text, board x,y; h text height)
J1: Top Overlay "Yellow" at 92.762,107.786 h0.8 r180; Top Overlay "Green" at 103.049,107.786 h0.8 r180; Top Overlay "1" at 101.906,91.567 h0.8; Top Overlay "8" at 89.333,88.9 h0.8
J2: Top Overlay "Yellow" at 110.855,107.786 h0.8 r180; Top Overlay "Green" at 121.142,107.786 h0.8 r180; Top Overlay "1" at 119.999,91.567 h0.8; Top Overlay "8" at 107.426,88.9 h0.8